# Altium PCB pwr_pcube.PcbDoc
Units mm, origin at the board's own origin, x right, y up, seen from the top; angles counter-clockwise.
Board outline 39.6 x 39.6 mm, 2 copper layers (Top Layer, Bottom Layer); 237 components, 177 nets, 628 pads, 12 vias.
Unrouted connection lines stored in the file: 418.
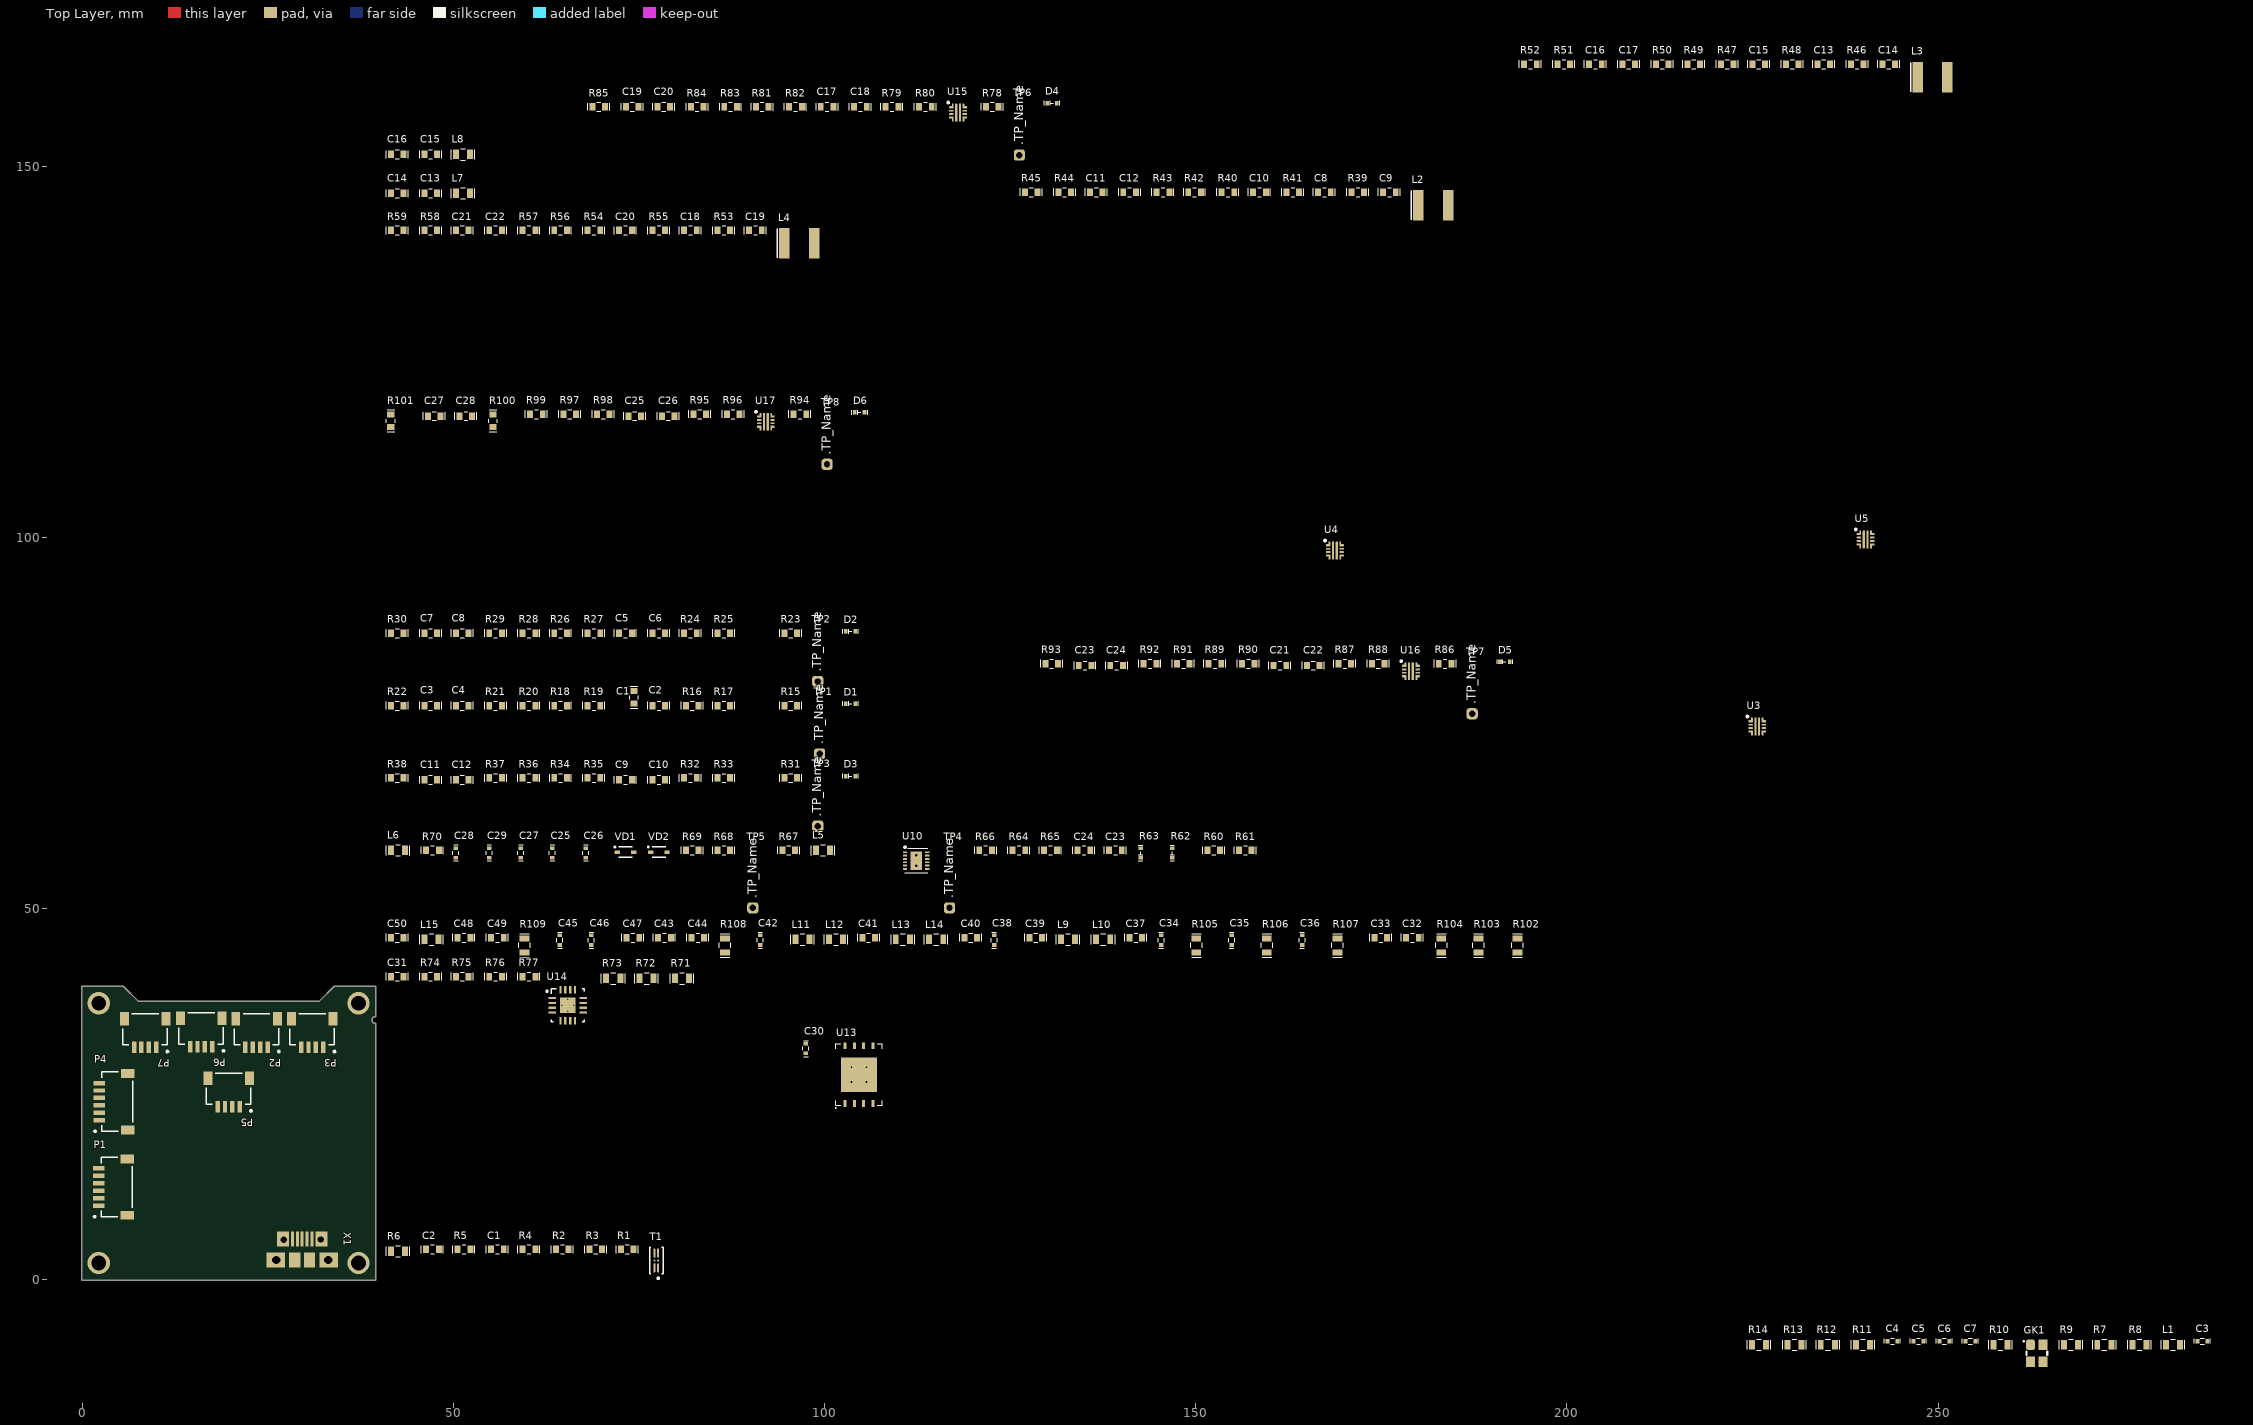
[diagram p0: Top Layer view]
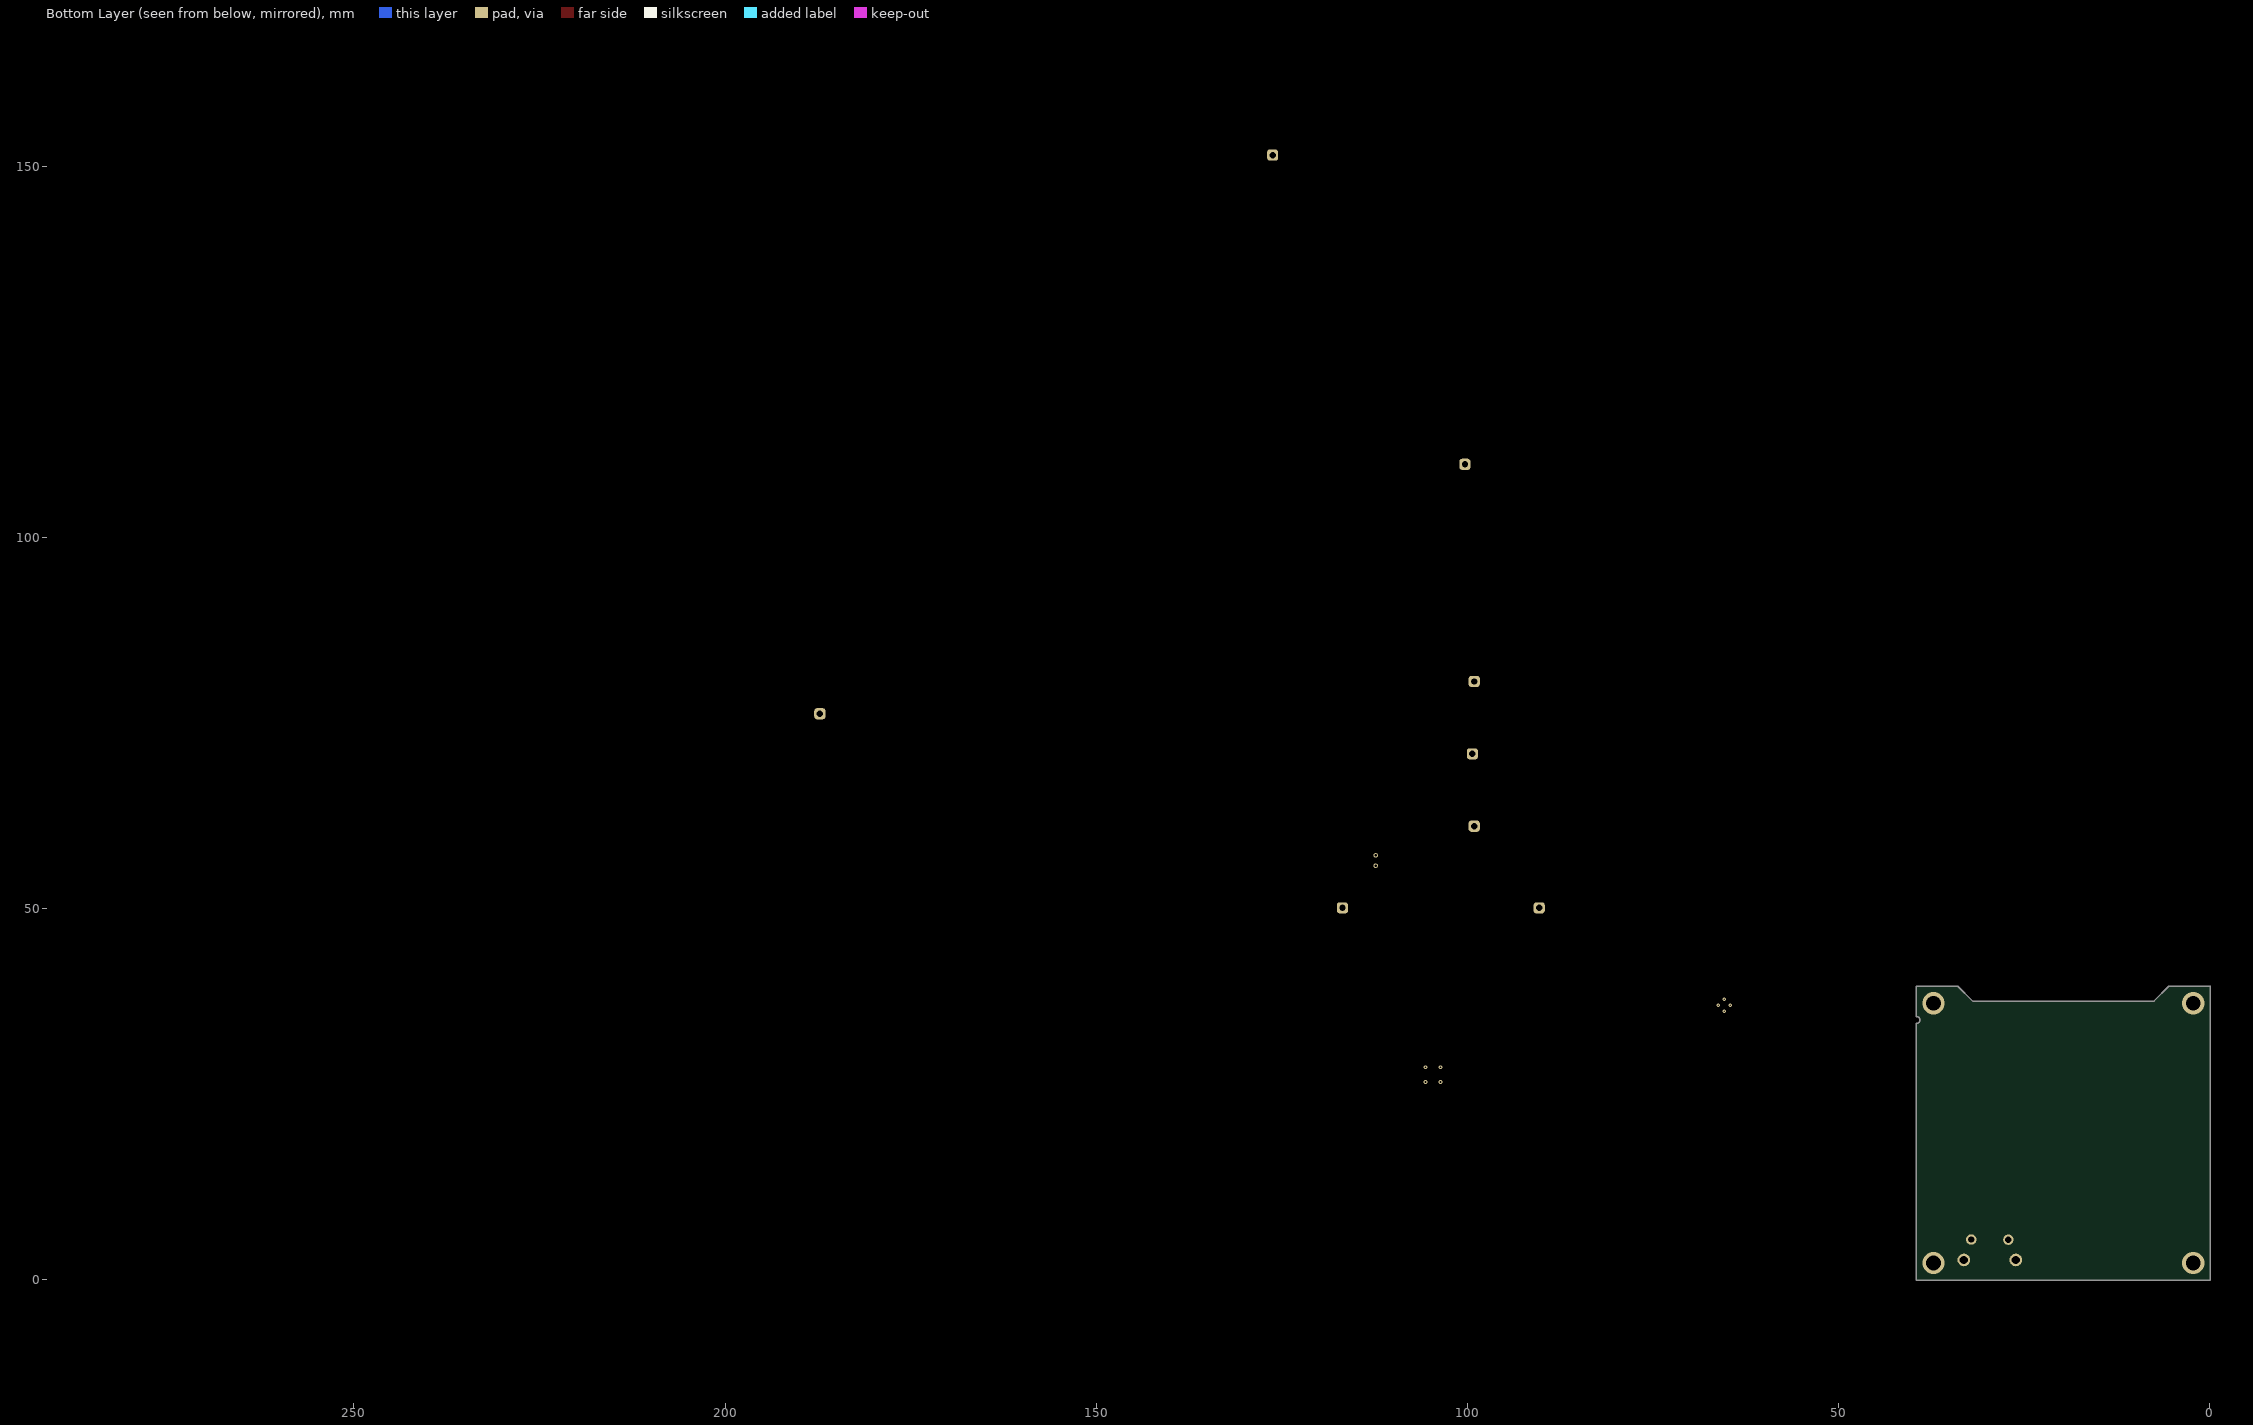
[diagram p1: Bottom Layer view, seen from below]

## Layer stack, top to bottom
Top Solder: solder mask 0.0102, Solder Resist, Dk 3.5
Top Layer: signal copper 0.0356
Dielectric 1: dielectric 0.32, FR-4, Dk 4.8
Bottom Layer: signal copper 0.0356
Bottom Solder: solder mask 0.0102, Solder Resist, Dk 3.5

## Board outline
0,-0.05 cw(c0,0) -0.05,0 -0.05,39.5 cw(c0,39.5) 0,39.55 5.5,39.55 cw(c5.5,39.5) 5.536,39.535 7.521,37.55 31.979,37.55 33.964,39.536 cw(c34,39.5) 34,39.55 39.5,39.55 cw(c39.5,39.5) 39.55,39.5 39.55,35.5 cw(c39.5,35.5) 39.5,35.45 ccw(c39.5,35) 39.5,34.55 cw(c39.5,34.5) 39.55,34.5 39.55,0 cw(c39.5,0) 39.5,-0.05

## Design rules (kind name [scope] priority, off if disabled: settings)
Clearance [All] p1: gap=0.254 ignorepadtopadclearanceinfootprint=FALSE except(0: Arc-Hole Track-Hole SMDPad-Hole THPad-Hole Via-Hole Fill-Hole Poly-Hole Region-Hole Text-Hole)
DiffPairsRouting [All] p1: maxlimit=0.254 minlimit=0.254 mostfreqgap=0.254 toplayer_minwidth=0.381 toplayer_maxwidth=0.381 toplayer_prefwidth=0.381 bottomlayer_minwidth=0.381 bottomlayer_maxwidth=0.381 bottomlayer_prefwidth=0.381 maxuncoupledlength=12.7
PolygonConnect [All] p1: connectstyle=Relief reliefconductorwidth=0.254 reliefentries=4 polygonreliefangle="90 Angle" airgapwidth=0.254
RoomDefinition VBat-5V0 [InComponentClass('VBat-5V0')] p1: confinementstyle=ConfineIn formatcopy=TRUE lockcomponents=FALSE outline 40.6,150.6 53.1,150.6 53.1,154.6 40.6,154.6
RoomDefinition VBat-3V3 [InComponentClass('VBat-3V3')] p2: confinementstyle=ConfineIn formatcopy=TRUE lockcomponents=FALSE outline 40.6,145.35 53.1,145.35 53.1,149.35 40.6,149.35
RoomDefinition SolarPanel_Input_3 [InComponentClass('SolarPanel_Input_3')] p3: confinementstyle=ConfineIn formatcopy=TRUE lockcomponents=FALSE outline 40.6,137.1 99.85,137.1 99.85,144.1 40.6,144.1
RoomDefinition SolarPanel_Input_2 [InComponentClass('SolarPanel_Input_2')] p4: confinementstyle=ConfineIn formatcopy=TRUE lockcomponents=FALSE outline 193.25,95.25 252.5,95.25 252.5,166.5 193.25,166.5
RoomDefinition SolarPanel_Input_1 [InComponentClass('SolarPanel_Input_1')] p5: confinementstyle=ConfineIn formatcopy=TRUE lockcomponents=FALSE outline 126,106 185.25,106 185.25,149.25 126,149.25
RoomDefinition RF [InComponentClass('RF')] p6: confinementstyle=ConfineIn formatcopy=TRUE lockcomponents=FALSE outline 40.6,43.1 196.6,43.1 196.6,49.1 40.6,49.1
RoomDefinition memory [InComponentClass('memory')] p7: confinementstyle=ConfineIn formatcopy=TRUE lockcomponents=FALSE outline 96.75,22.75 108,22.75 108,34.5 96.75,34.5
RoomDefinition MCU+LORA [InComponentClass('MCU+LORA')] p8: confinementstyle=ConfineIn formatcopy=TRUE lockcomponents=FALSE outline 223.95,-12 286.95,-12 286.95,50.75 223.95,50.75
RoomDefinition eFuse_6 [InComponentClass('eFuse_6')] p9: confinementstyle=ConfineIn formatcopy=TRUE lockcomponents=FALSE outline 40.6,108.85 106.1,108.85 106.1,119.35 40.6,119.35
RoomDefinition eFuse_5 [InComponentClass('eFuse_5')] p10: confinementstyle=ConfineIn formatcopy=TRUE lockcomponents=FALSE outline 128.75,75.25 193,75.25 193,85.75 128.75,85.75
RoomDefinition eFuse_4 [InComponentClass('eFuse_4')] p11: confinementstyle=ConfineIn formatcopy=TRUE lockcomponents=FALSE outline 67.75,150.5 132,150.5 132,161 67.75,161
RoomDefinition eFuse_3 [InComponentClass('eFuse_3')] p12: confinementstyle=ConfineIn formatcopy=TRUE lockcomponents=FALSE outline 40.6,79.6 104.85,79.6 104.85,90.1 40.6,90.1
RoomDefinition eFuse_2 [InComponentClass('eFuse_2')] p13: confinementstyle=ConfineIn formatcopy=TRUE lockcomponents=FALSE outline 40.6,69.85 104.85,69.85 104.85,80.35 40.6,80.35
RoomDefinition eFuse_1 [InComponentClass('eFuse_1')] p14: confinementstyle=ConfineIn formatcopy=TRUE lockcomponents=FALSE outline 40.6,60.1 104.85,60.1 104.85,70.35 40.6,70.35
RoutingVias [All] p1: holewidth=0.711 width=1.27 viastyle="Through Hole" minholewidth=0.711 minwidth=1.27 maxholewidth=0.711 maxwidth=1.27
SolderMaskExpansion [All] p1: expansion=0.102 istentingtop=FALSE
Width [All] p1: maxlimit=0.254 minlimit=0.254 preferedwidth=0.254
29 further rules are at their usual default settings.

## Classes and differential pairs
channel class mboard_dcdc: VBat-3V3 VBat-5V0
component class VBat-5V0: L8 U12 С15 С16
component class VBat-3V3: L7 U11 С13 С14
component class RF: C32 C33 C34 C35 C36 C37 C38 C39 C40 C41 C42 C43 C44 C45 C46 C47 C48 C49 C50 J1 L9 L10 L11 L12 L13 L14 L15 R102 R103 R104 R105 R106 R107 R108 R109 U18 U19 U20
component class pwr_ctrl_0: C31 R71 R72 R73 R74 R75 R76 R77 U14
component class memory: C30 U13
component class eFuse_6: D6 R94 R95 R96 R97 R98 R99 R100 R101 TP8 U17 С25 С26 С27 С28
component class eFuse_5: D5 R86 R87 R88 R89 R90 R91 R92 R93 TP7 U16 С21 С22 С23 С24
component class eFuse_4: D4 R78 R79 R80 R81 R82 R83 R84 R85 TP6 U15 С17 С18 С19 С20
component class eFuse_1: D3 R31 R32 R33 R34 R35 R36 R37 R38 TP3 U5 С9 С10 С11 С12
channel class mboard_pwr_harvewster: SolarPanel_Input_1 SolarPanel_Input_2 SolarPanel_Input_3
channel class mboard_pwr_fuse: eFuse_2 eFuse_3 eFuse_11 eFuse_12
component class VCP_FTDI: C23 C24 C25 C26 C27 C28 C29 L5 L6 R60 R61 R62 R63 R64 R65 R66 R67 R68 R69 R70 TP4 TP5 U7 U10 VD1 VD2 X1
component class SolarPanel_Input_3: C18 C19 C20 C21 C22 L4 R53 R54 R55 R56 R57 R58 R59 U6
component class SolarPanel_Input_2: C13 C14 C15 C16 C17 L3 R46 R47 R48 R49 R50 R51 R52
component class SolarPanel_Input_1: C8 C9 C10 C11 C12 L2 R39 R40 R41 R42 R43 R44 R45
component class MCU+LORA: C3 C4 C5 C6 C7 GK1 L1 R7 R8 R9 R10 R11 R12 R13 R14
component class mboard: P1 P2 P3 P4 P5 P6 P7
component class eFuse_3: D2 R23 R24 R25 R26 R27 R28 R29 R30 TP2 U4 С5 С6 С7 С8
component class eFuse_2: D1 R15 R16 R17 R18 R19 R20 R21 R22 TP1 U3 С1 С2 С3 С4
component class Battery_Ctrl: C1 C2 R1 R2 R3 R4 R5 R6 T1 U1
differential pair USB: +USB_P -USB_N
differential pair I_USB: +I_USB_P -I_USB_N

## Components (designator, comment, footprint, x,y, rotation, side; value= is the part's Value field where it differs from the comment)
C1 "0.1мкФ" SMD_C0603 55.1,4.1 r0 top (schematic designator C7)
C2 "0.1мкФ" SMD_C0603 46.35,4.1 r0 top (schematic designator C8)
C3 "K10-79" SMD_C0402 284.95,-8.25 r0 top value=0,47мкФ (schematic designator C16)
C4 "K10-79" SMD_C0402 243.2,-8.25 r0 top value=0,1мкФ (schematic designator C37)
C5 "K10-79" SMD_C0402 246.7,-8.25 r0 top value=0,1мкФ (schematic designator C38)
C6 "K10-79" SMD_C0402 250.2,-8.25 r0 top value=0,1мкФ (schematic designator C39)
C7 "K10-79" SMD_C0402 253.7,-8.25 r0 top value=0,1мкФ (schematic designator C40)
C8 "10мкФ" SMD_C0603 166.5,146.5 r0 top (schematic designator C2)
C9 "10мкФ" SMD_C0603 175.25,146.5 r0 top (schematic designator C3)
C10 "10мкФ" SMD_C0603 157.75,146.5 r0 top (schematic designator C4)
C11 "10нФ" SMD_C0603 135.75,146.5 r0 top (schematic designator C5)
C12 "1мкФ" SMD_C0603 140.25,146.5 r0 top (schematic designator C6)
C13 "10мкФ" SMD_C0603 233.75,163.75 r0 top (schematic designator C2)
C14 "10мкФ" SMD_C0603 242.5,163.75 r0 top (schematic designator C3)
C15 "10мкФ" SMD_C0603 225,163.75 r0 top (schematic designator C4)
C16 "10нФ" SMD_C0603 203,163.75 r0 top (schematic designator C5)
C17 "1мкФ" SMD_C0603 207.5,163.75 r0 top (schematic designator C6)
C18 "10мкФ" SMD_C0603 81.1,141.35 r0 top (schematic designator C2)
C19 "10мкФ" SMD_C0603 89.85,141.35 r0 top (schematic designator C3)
C20 "10мкФ" SMD_C0603 72.35,141.35 r0 top (schematic designator C4)
C21 "10нФ" SMD_C0603 50.35,141.35 r0 top (schematic designator C5)
C22 "1мкФ" SMD_C0603 54.85,141.35 r0 top (schematic designator C6)
C23 "10мкФ" SMD_C0603 138.35,57.85 r0 top (schematic designator C9)
C24 "10мкФ" SMD_C0603 134.1,57.85 r0 top (schematic designator C10)
C25 "47пФ" SMD_C0402 63.35,56.85 r90 top (schematic designator C11)
C26 "47пФ" SMD_C0402 67.85,56.85 r90 top (schematic designator C12)
C27 "0.1мкФ" SMD_C0402 59.1,56.85 r90 top (schematic designator C13)
C28 "10нФ" SMD_C0402 50.35,56.85 r90 top (schematic designator C14)
C29 "0.1мкФ" SMD_C0402 54.85,56.85 r90 top (schematic designator C15)
C30 "K10-79" SMD_C0402 97.5,30.5 r90 top value=0,1мкФ (schematic designator C36)
C31 "0.1мкФ" SMD_C0603 41.6,40.85 r0 top (schematic designator C1)
C32 "K10-79" SMD_C0603 178.35,46.1 r0 top value=68пФ (schematic designator C17)
C33 "K10-79" SMD_C0603 174.1,46.1 r0 top value=10нФ (schematic designator C18)
C34 "K10-79" SMD_C0402 145.35,45.1 r90 top value=1нФ (schematic designator C19)
C35 "K10-79" SMD_C0402 154.85,45.1 r90 top value=1нФ (schematic designator C20)
C36 "K10-79" SMD_C0402 164.35,45.1 r90 top value=1нФ (schematic designator C21)
C37 "K10-79" SMD_C0603 141.1,46.1 r0 top value=47нФ (schematic designator C22)
C38 "K10-79" SMD_C0402 122.85,45.1 r90 top value=100пФ (schematic designator C23)
C39 "K10-79" SMD_C0603 127.6,46.1 r0 top value=100пФ (schematic designator C24)
C40 "K10-79" SMD_C0603 118.85,46.1 r0 top value=68пФ (schematic designator C25)
C41 "K10-79" SMD_C0603 105.1,46.1 r0 top value=68пФ (schematic designator C26)
C42 "K10-79" SMD_C0402 91.35,45.1 r90 top value=4.3пФ (schematic designator C27)
C43 "K10-79" SMD_C0603 77.6,46.1 r0 top value=6.8пФ (schematic designator C28)
C44 "K10-79" SMD_C0603 82.1,46.1 r0 top value=6.9пФ (schematic designator C29)
C45 "K10-79" SMD_C0402 64.35,45.1 r90 top value=DNP (schematic designator C30)
C46 "K10-79" SMD_C0402 68.6,45.1 r90 top value=0,1мкФ (schematic designator C31)
C47 "K10-79" SMD_C0603 73.35,46.1 r0 top value=5.6пФ (schematic designator C32)
C48 "K10-79" SMD_C0603 50.6,46.1 r0 top value=3.6пФ (schematic designator C33)
C49 "K10-79" SMD_C0603 55.1,46.1 r0 top value=DNP (schematic designator C34)
C50 "K10-79" SMD_C0603 41.6,46.1 r0 top value=4.7пФ (schematic designator C35)
D1 "LED" LED_0402_RED 102.85,77.6 r0 top value=red
D2 "LED" LED_0402_RED 102.85,87.35 r0 top value=red (schematic designator D1)
D3 "LED" LED_0402_RED 102.85,67.85 r0 top value=red (schematic designator D1)
D4 "LED" LED_0402_RED 130,158.5 r0 top value=red (schematic designator D1)
D5 "LED" LED_0402_RED 191,83.25 r0 top value=red (schematic designator D1)
D6 "LED" LED_0402_RED 104.1,116.85 r0 top value=red (schematic designator D1)
GK1 "ASFL1-32.000MHZ-EK" SMD_3025_Crustal_Oscilator 262.45,-8.75 r0 top
L1 "1мкГн" SMD_0805 280.7,-8.75 r0 top (schematic designator L4)
L2 "LPS4018-223ML" INDUCTOR-4x4 182,144.75 r0 top value=10мкГн (schematic designator L1)
L3 "LPS4018-223ML" INDUCTOR-4x4 249.25,162 r0 top value=10мкГн (schematic designator L1)
L4 "LPS4018-223ML" INDUCTOR-4x4 96.6,139.6 r0 top value=10мкГн (schematic designator L1)
L5 "1мкГн" SMD_0805 98.85,57.85 r0 top (schematic designator L2)
L6 "1мкГн" SMD_0805 41.6,57.85 r0 top (schematic designator L3)
L7 "Inductor" SMD_0805 50.35,146.35 r0 top value=4.7мкГн (schematic designator L12)
L8 "Inductor" SMD_0805 50.35,151.6 r0 top value=4.7мкГн (schematic designator L12)
L9 "Inductor" SMD_0805 131.85,45.85 r0 top value=68нГн (schematic designator L5)
L10 "Inductor" SMD_0805 136.6,45.85 r0 top value=82нГн (schematic designator L6)
L11 "Inductor" SMD_0805 96.1,45.85 r0 top value=6.8нГн (schematic designator L7)
L12 "Inductor" SMD_0805 100.6,45.85 r0 top value=6.8нГн (schematic designator L8)
L13 "Inductor" SMD_0805 109.6,45.85 r0 top value=6.8нГн (schematic designator L9)
L14 "Inductor" SMD_0805 114.1,45.85 r0 top value=16нГн (schematic designator L10)
L15 "Inductor" SMD_0805 46.1,45.85 r0 top value=332нГн (schematic designator L11)
P1 "SH_1.0_6" SH_1.0_6#1 4.188,12.5 r90 top
P2 "SH_1.0_4" SH_1.0_6#2 23.5,33.25 r180 top
P3 "SH_1.0_4" SH_1.0_6#2 31,33.25 r180 top
P4 "SH_1.0_6" SH_1.0_6#1 4.25,24 r90 top
P5 "SH_1.0_4" SH_1.0_6#2 19.75,25.25 r180 top
P6 "SH_1.0_4" SH_1.0_6#2 16.05,33.35 r180 top
P7 "SH_1.0_4" SH_1.0_6#2 8.5,33.25 r180 top
R1 "1к" SMD_0603 72.6,4.1 r0 top (schematic designator R23)
R2 "300" SMD_0603 63.85,4.1 r0 top (schematic designator R24)
R3 "20" SMD_0603 68.35,4.1 r0 top (schematic designator R25)
R4 "100" SMD_0603 59.35,4.1 r0 top (schematic designator R26)
R5 "100" SMD_0603 50.6,4.1 r0 top (schematic designator R27)
R6 "10мОм 1% 100ppm/°C" SMD_0805 41.6,3.85 r0 top (schematic designator R28)
R7 "OSM R1-12" SMD_0805 271.45,-8.75 r0 top value=10к (schematic designator R40)
R8 "OSM R1-12" SMD_0805 276.2,-8.75 r0 top value=10к (schematic designator R41)
R9 "OSM R1-12" SMD_0805 266.95,-8.75 r0 top value=10к (schematic designator R54)
R10 "OSM R1-12" SMD_0805 257.45,-8.75 r0 top value=10к (schematic designator R55)
R11 "OSM R1-12" SMD_0805 238.95,-8.75 r0 top value=100к (schematic designator R42)
R12 "OSM R1-12" SMD_0805 234.2,-8.75 r0 top value=10к (schematic designator R43)
R13 "OSM R1-12" SMD_0805 229.7,-8.75 r0 top value=0 (schematic designator R44)
R14 "OSM R1-12" SMD_0805 224.95,-8.75 r0 top value=DNP (schematic designator R45)
R15 "10к" SMD_0603 94.6,77.35 r0 top (schematic designator R1)
R16 "470к" SMD_0603 81.35,77.35 r0 top (schematic designator R2)
R17 "47к" SMD_0603 85.6,77.35 r0 top (schematic designator R3)
R18 "91к" SMD_0603 63.6,77.35 r0 top (schematic designator R4)
R19 "18к" SMD_0603 68.1,77.35 r0 top (schematic designator R5)
R20 "10к" SMD_0603 59.35,77.35 r0 top (schematic designator R6)
R21 "1к" SMD_0603 54.85,77.35 r0 top (schematic designator R7)
R22 "3.3к" SMD_0603 41.6,77.35 r0 top (schematic designator R8)
R23 "10к" SMD_0603 94.6,87.1 r0 top (schematic designator R1)
R24 "470к" SMD_0603 81.1,87.1 r0 top (schematic designator R2)
R25 "47к" SMD_0603 85.6,87.1 r0 top (schematic designator R3)
R26 "91к" SMD_0603 63.6,87.1 r0 top (schematic designator R4)
R27 "18к" SMD_0603 68.1,87.1 r0 top (schematic designator R5)
R28 "10к" SMD_0603 59.35,87.1 r0 top (schematic designator R6)
R29 "1к" SMD_0603 54.85,87.1 r0 top (schematic designator R7)
R30 "3.3к" SMD_0603 41.6,87.1 r0 top (schematic designator R8)
R31 "10к" SMD_0603 94.6,67.6 r0 top (schematic designator R1)
R32 "470к" SMD_0603 81.1,67.6 r0 top (schematic designator R2)
R33 "47к" SMD_0603 85.6,67.6 r0 top (schematic designator R3)
R34 "91к" SMD_0603 63.6,67.6 r0 top (schematic designator R4)
R35 "18к" SMD_0603 68.1,67.6 r0 top (schematic designator R5)
R36 "10к" SMD_0603 59.35,67.6 r0 top (schematic designator R6)
R37 "1к" SMD_0603 54.85,67.6 r0 top (schematic designator R7)
R38 "3.3к" SMD_0603 41.6,67.6 r0 top (schematic designator R8)
R39 "2M2" SMD_0603 171,146.5 r0 top (schematic designator R16)
R40 "2M2" SMD_0603 153.5,146.5 r0 top (schematic designator R17)
R41 "1M" SMD_0603 162.25,146.5 r0 top (schematic designator R18)
R42 "10к" SMD_0603 149,146.5 r0 top (schematic designator R19)
R43 "1M" SMD_0603 144.75,146.5 r0 top (schematic designator R20)
R44 "0" SMD_0603 131.5,146.5 r0 top (schematic designator R21)
R45 "1M" SMD_0603 127,146.5 r0 top (schematic designator R22)
R46 "2M2" SMD_0603 238.25,163.75 r0 top (schematic designator R16)
R47 "2M2" SMD_0603 220.75,163.75 r0 top (schematic designator R17)
R48 "1M" SMD_0603 229.5,163.75 r0 top (schematic designator R18)
R49 "10к" SMD_0603 216.25,163.75 r0 top (schematic designator R19)
R50 "1M" SMD_0603 212,163.75 r0 top (schematic designator R20)
R51 "0" SMD_0603 198.75,163.75 r0 top (schematic designator R21)
R52 "1M" SMD_0603 194.25,163.75 r0 top (schematic designator R22)
R53 "2M2" SMD_0603 85.6,141.35 r0 top (schematic designator R16)
R54 "2M2" SMD_0603 68.1,141.35 r0 top (schematic designator R17)
R55 "1M" SMD_0603 76.85,141.35 r0 top (schematic designator R18)
R56 "10к" SMD_0603 63.6,141.35 r0 top (schematic designator R19)
R57 "1M" SMD_0603 59.35,141.35 r0 top (schematic designator R20)
R58 "0" SMD_0603 46.1,141.35 r0 top (schematic designator R21)
R59 "1M" SMD_0603 41.6,141.35 r0 top (schematic designator R22)
R60 "10к" SMD_0603 151.6,57.85 r0 top (schematic designator R29)
R61 "10к" SMD_0603 155.85,57.85 r0 top (schematic designator R30)
R62 "LED" LED_0402_RED 146.85,56.85 r90 top value=red (schematic designator R31)
R63 "LED" LED_0402_RED 142.6,56.85 r90 top value=green (schematic designator R32)
R64 "10к" SMD_0603 125.35,57.85 r0 top (schematic designator R33)
R65 "100к" SMD_0603 129.6,57.85 r0 top (schematic designator R34)
R66 "10к" SMD_0603 120.85,57.85 r0 top (schematic designator R35)
R67 "33" SMD_0603 94.35,57.85 r0 top (schematic designator R36)
R68 "33" SMD_0603 85.6,57.85 r0 top (schematic designator R37)
R69 "4.7к" SMD_0603 81.35,57.85 r0 top (schematic designator R38)
R70 "10к" SMD_0603 46.35,57.85 r0 top (schematic designator R39)
R71 "10мОм 1% 100ppm/°C" SMD_0805 79.85,40.6 r0 top (schematic designator R9)
R72 "10мОм 1% 100ppm/°C" SMD_0805 75.1,40.6 r0 top (schematic designator R10)
R73 "10мОм 1% 100ppm/°C" SMD_0805 70.6,40.6 r0 top (schematic designator R11)
R74 "10к" SMD_0603 46.1,40.85 r0 top (schematic designator R12)
R75 "10к" SMD_0603 50.35,40.85 r0 top (schematic designator R13)
R76 "10к" SMD_0603 54.85,40.85 r0 top (schematic designator R14)
R77 "10к" SMD_0603 59.35,40.85 r0 top (schematic designator R15)
R78 "10к" SMD_0603 121.75,158 r0 top (schematic designator R1)
R79 "470к" SMD_0603 108.25,158 r0 top (schematic designator R2)
R80 "47к" SMD_0603 112.75,158 r0 top (schematic designator R3)
R81 "91к" SMD_0603 90.75,158 r0 top (schematic designator R4)
R82 "18к" SMD_0603 95.25,158 r0 top (schematic designator R5)
R83 "10к" SMD_0603 86.5,158 r0 top (schematic designator R6)
R84 "1к" SMD_0603 82,158 r0 top (schematic designator R7)
R85 "3.3к" SMD_0603 68.75,158 r0 top (schematic designator R8)
R86 "10к" SMD_0603 182.75,83 r0 top (schematic designator R1)
R87 "470к" SMD_0603 169.25,83 r0 top (schematic designator R2)
R88 "47к" SMD_0603 173.75,83 r0 top (schematic designator R3)
R89 "91к" SMD_0603 151.75,83 r0 top (schematic designator R4)
R90 "18к" SMD_0603 156.25,83 r0 top (schematic designator R5)
R91 "10к" SMD_0603 147.5,83 r0 top (schematic designator R6)
R92 "1к" SMD_0603 143,83 r0 top (schematic designator R7)
R93 "3.3к" SMD_0603 129.75,83 r0 top (schematic designator R8)
R94 "10к" SMD_0603 95.85,116.6 r0 top (schematic designator R1)
R95 "470к" SMD_0603 82.35,116.6 r0 top (schematic designator R2)
R96 "47к" SMD_0603 86.85,116.6 r0 top (schematic designator R3)
R97 "91к" SMD_0603 64.85,116.6 r0 top (schematic designator R4)
R98 "18к" SMD_0603 69.35,116.6 r0 top (schematic designator R5)
R99 "10к" SMD_0603 60.35,116.6 r0 top (schematic designator R6)
R100 "1к" SMD_0603 55.35,114.85 r90 top (schematic designator R7)
R101 "3.3к" SMD_0603 41.6,114.85 r90 top (schematic designator R8)
R102 "OSM R1-12" SMD_0805 193.35,44.1 r90 top value=100 (schematic designator R46)
R103 "OSM R1-12" SMD_0805 188.1,44.1 r90 top value=100 (schematic designator R47)
R104 "OSM R1-12" SMD_0805 183.1,44.1 r90 top value=100 (schematic designator R48)
R105 "OSM R1-12" SMD_0805 150.1,44.1 r90 top value=1M (schematic designator R49)
R106 "OSM R1-12" SMD_0805 159.6,44.1 r90 top value=1M (schematic designator R50)
R107 "OSM R1-12" SMD_0805 169.1,44.1 r90 top value=1M (schematic designator R51)
R108 "OSM R1-12" SMD_0805 86.6,44.1 r90 top value=50 (schematic designator R52)
R109 "OSM R1-12" SMD_0805 59.6,44.1 r90 top value=10k (schematic designator R53)
T1 "EFC8811R-TF" FP-568AL-MFG 77.35,2.6 r90 top
TP1 "V_OUT" TestPoint 99.35,70.85 r90 top
TP2 "V_OUT" TestPoint 99.1,80.6 r90 top (schematic designator TP1)
TP3 "V_OUT" TestPoint 99.1,61.1 r90 top (schematic designator TP1)
TP4 "VCP_RX" TestPoint 116.85,50.1 r90 top (schematic designator TP2)
TP5 "VCP_TX" TestPoint 90.35,50.1 r90 top (schematic designator TP3)
TP6 "V_OUT" TestPoint 126.25,151.5 r90 top (schematic designator TP1)
TP7 "V_OUT" TestPoint 187.25,76.25 r90 top (schematic designator TP1)
TP8 "V_OUT" TestPoint 100.35,109.85 r90 top (schematic designator TP1)
U3 "TPS25947x" VQFN-HR-10 225.65,74.55 r0 top (schematic designator U1)
U4 "TPS25947x" VQFN-HR-10 168.75,98.25 r0 top (schematic designator U1)
U5 "TPS25947x" VQFN-HR-10 240.25,99.75 r0 top (schematic designator U1)
U10 "FT234XD" DFN-12 110.85,57.6 r0 top (schematic designator U6)
U13 "S25FL128SAGN" WSON-8_6x8 102.75,23.75 r90 top (schematic designator U12)
U14 "INA3221" VQFN-16 65.421,36.975 r0 top (schematic designator U2)
U15 "TPS25947x" VQFN-HR-10 118,157.25 r0 top (schematic designator U1)
U16 "TPS25947x" VQFN-HR-10 179,82 r0 top (schematic designator U1)
U17 "TPS25947x" VQFN-HR-10 92.1,115.6 r0 top (schematic designator U1)
VD1 "PESD5V0" SOD-323 72.1,57.6 r0 top
VD2 "PESD5V0" SOD-323 76.6,57.6 r0 top
X1 "mico-BF" MicroUSB-Molex-105017 29.65,5.375 r0 top
С1 "10uF 25V" SMD_C0603 74.35,77.6 r90 top
С2 "10uF 25V" SMD_C0603 76.85,77.35 r0 top
С3 "2.4нФ" SMD_C0603 46.1,77.35 r0 top
С4 "16нФ" SMD_C0603 50.35,77.35 r0 top
С5 "10uF 25V" SMD_C0603 72.35,87.1 r0 top (schematic designator С1)
С6 "10uF 25V" SMD_C0603 76.85,87.1 r0 top (schematic designator С2)
С7 "2.4нФ" SMD_C0603 46.1,87.1 r0 top (schematic designator С3)
С8 "16нФ" SMD_C0603 50.35,87.1 r0 top (schematic designator С4)
С9 "10uF 25V" SMD_C0603 72.35,67.35 r0 top (schematic designator С1)
С10 "10uF 25V" SMD_C0603 76.85,67.35 r0 top (schematic designator С2)
С11 "2.4нФ" SMD_C0603 46.1,67.35 r0 top (schematic designator С3)
С12 "16нФ" SMD_C0603 50.35,67.35 r0 top (schematic designator С4)
С13 "10uF 25V" SMD_C0603 46.1,146.35 r0 top (schematic designator С5)
С14 "10uF 25V" SMD_C0603 41.6,146.35 r0 top (schematic designator С6)
С15 "10uF 25V" SMD_C0603 46.1,151.6 r0 top (schematic designator С5)
С16 "10uF 25V" SMD_C0603 41.6,151.6 r0 top (schematic designator С6)
С17 "10uF 25V" SMD_C0603 99.5,158 r0 top (schematic designator С1)
С18 "10uF 25V" SMD_C0603 104,158 r0 top (schematic designator С2)
С19 "2.4нФ" SMD_C0603 73.25,158 r0 top (schematic designator С3)
С20 "16нФ" SMD_C0603 77.5,158 r0 top (schematic designator С4)
С21 "10uF 25V" SMD_C0603 160.5,82.75 r0 top (schematic designator С1)
С22 "10uF 25V" SMD_C0603 165,82.75 r0 top (schematic designator С2)
С23 "2.4нФ" SMD_C0603 134.25,82.75 r0 top (schematic designator С3)
С24 "16нФ" SMD_C0603 138.5,82.75 r0 top (schematic designator С4)
С25 "10uF 25V" SMD_C0603 73.6,116.35 r0 top (schematic designator С1)
С26 "10uF 25V" SMD_C0603 78.1,116.35 r0 top (schematic designator С2)
С27 "2.4нФ" SMD_C0603 46.6,116.35 r0 top (schematic designator С3)
С28 "16нФ" SMD_C0603 50.85,116.35 r0 top (schematic designator С4)

## Footprints (in the part's own frame and the unit in brackets; to place one, negate y for a bottom-side part, rotate by r counter-clockwise, add the part's x,y. Pads: shape width x height; smd on the part's side, far side on the other; paste and mask are expansions set on the pad)
DFN-12 [mm] "DFN, 12-Leads, Body 3,00x3,00mm, Pitch 0,45mm, Thermal Pad 1,58x2,48mm, IPC Medium Density"
  rect 0.6x0.25 smd: 1(0,0) 2(0,-0.45) 3(0,-0.9) 4(0,-1.35) 5(0,-1.8) 6(0,-2.25) 7(3,-2.25) 8(3,-1.8) 9(3,-1.35) 10(3,-0.9) 11(3,-0.45) 12(3,0)
  rect 1.58x2.48 smd: 13(1.5,-1.125)
  round 0.6 hole 0.3: 13(1.525,-1.825) 13(1.525,-0.425)
  silkscreen extent -0.12,-2.75 3.05,0.8, body extent -0.05,-2.62 3.05,0.38, height 0.75
FP-568AL-MFG [mm]
  rrect100% 1.25x0.25 smd paste+0 mask+0: 1(-1,-0.25) 3(1,-0.25) 4(1,0.25) 6(-1,0.25)
  round 0.25 smd paste+0 mask+0: 2(0,-0.25) 5(0,0.25)
  silkscreen extent -2.52,-0.91 1.8,0.91, body extent -1.9,-1.01 1.9,1.01, height 0.25
INDUCTOR-4x4 [mm] "Precision Wire Wound Inductor, 2-Leads, Body 4,00x4,00mm, IPC Medium Density"
  rect 1.4x4.1 smd: 1(-2,0) 2(2,0)
  silkscreen extent -2.95,-1.95 -2.95,1.95, body extent -2.1,-2 2.1,2, height 1.8
LED_0402_RED [mm]
  rect 0.5x0.6 smd: 1(0,0) 2(1.3,0)
  silkscreen extent -0.4,-0.3 1.7,0.3, body extent 0.2,-0.3 1.2,0.3, height 0.2
MicroUSB-Molex-105017 [mm]
  rect 2.5x2 smd: 0(-3.575,-2.725) 0(3.575,-2.725)
  round 1.7 hole 1.1 mask+0.15: 0(-3.5,-2.7) 0(3.5,-2.7)
  rect 1.6x2 smd: 0(-2.6,0.125) 0(2.6,0.125)
  round 1.4 hole 0.85: 0(-2.5,0.025) 0(2.5,0.05)
  rect 1.5x2 smd: 0(-1,-2.725) 0(1,-2.725)
  rect 0.4x2 smd: 1(-1.3,0.125) 2(-0.65,0.125) 3(0,0.125) 4(0.65,0.125) 5(1.3,0.125)
  body extent -4.1,-5.2 4.1,0.2, height 2.78
SH_1.0_6#1 [mm]
  rect 0.6x1.55 smd: 1(-2.5,1.938) 2(-1.5,1.938) 3(-0.5,1.938) 4(0.5,1.938) 5(1.5,1.938) 6(2.5,1.938)
  rect 1.2x1.8 smd: MP1(-3.8,-1.9) MP2(3.8,-1.9)
  silkscreen extent -4.12,-2.6 4,2.62
SH_1.0_6#2 [mm]
  rect 0.6x1.55 smd: 1(-1.5,1.938) 2(-0.5,1.938) 3(0.5,1.938) 4(1.5,1.938)
  rect 1.2x1.8 smd: MP1(-2.8,-1.9) MP2(2.8,-1.9)
  silkscreen extent -3.13,-2.6 3,2.62
SMD_0603 [mm]
  rect 0.8x1 smd: 1(0,0) 2(1.7,0)
  silkscreen extent -0.64,-0.6 2.32,0.6, body extent 0.04,-0.42 1.68,0.43, height 0.43
SMD_0805 [mm]
  rect 0.8x1.3 smd: 1(0,0) 2(1.9,0)
  silkscreen extent -0.64,-0.76 2.54,0.76, body extent -0.05,-0.62 1.95,0.63, height 0.43
SMD_3025_Crustal_Oscilator [mm]
  rrect50% 1.2x1.4 smd: 1(0,0)
  rect 1.2x1.4 smd: 2(0,-2.3) 3(1.7,-2.3) 4(1.7,0)
  silkscreen extent -0.97,-1.38 2.27,0.57, body extent -0.4,-2.75 2.1,0.45, height 1.2
SMD_C0402 [mm]
  rect 0.5x0.6 smd: 1(0,0) 2(1.3,0)
  silkscreen extent -0.43,-0.4 1.73,0.4, body extent 0.05,-0.35 1.25,0.35, height 0.7
SMD_C0603 [mm]
  rect 0.8x1 smd: 1(0,0) 2(1.7,0)
  silkscreen extent -0.64,-0.6 2.32,0.6, body extent 0,-0.45 1.7,0.45, height 0.9
SOD-323 [mm] "SC-76 plastic surface mounted package; 2 leads"
  rrect50% 0.7x0.5 smd: 1(0,0)
  rect 0.7x0.5 smd: 2(2.2,0)
  silkscreen extent -0.38,-0.7 2,0.76, body extent -0.2,-0.67 2.4,0.68, height 1.1
TestPoint [mm]
  rrect50% 1.5x1.5 hole 0.85: 0(0,0)
VQFN-16 [mm]
  rrect33% 1x0.3 smd: 1(-2.079,0.975) 2(-2.079,0.325) 3(-2.079,-0.325) 4(-2.079,-0.975) 9(2.079,-0.975) 10(2.079,-0.325) 11(2.079,0.325) 12(2.079,0.975)
  rrect33% 0.3x1 smd: 5(-0.975,-2.079) 6(-0.325,-2.079) 7(0.325,-2.079) 8(0.975,-2.079) 13(0.975,2.079) 14(0.325,2.079) 15(-0.325,2.079) 16(-0.975,2.079)
  rrect11% 0.939x0.939 on Top Paste: 17(-0.57,-0.57) 17(-0.57,0.57) 17(0.57,-0.57) 17(0.57,0.57)
  rrect5% 2.1x2.1 smd paste-1.08: 17(0,0)
  silkscreen extent -2.92,-2.22 2.22,2.22, body extent -2,-2 2,2, height 0.92
VQFN-HR-10 [mm]
  rrect50% 0.6x0.3 smd: 1(-0.9,0.7) 4(-0.9,-0.7) 7(0.9,-0.7) 10(0.9,0.7)
  rrect50% 0.25x0.6 smd: 1(-0.725,0.875) 4(-0.725,-0.925) 7(0.725,-0.925) 10(0.725,0.875)
  rrect50% 0.6x0.25 smd: 2(-0.9,0.225) 3(-0.9,-0.225) 8(0.9,-0.225) 9(0.9,0.225)
  rrect50% 0.3x2.4 smd: 5(-0.25,-0.025) 6(0.25,-0.025)
  silkscreen extent -1.45,1.2 -1.2,1.45, body extent -1.1,-1.1 1.1,1.1, height 1
WSON-8_6x8 [mm] "SON, 8-Leads, Body 6,00x8,00mm, Pitch 1,27mm, Thermal Pad 4,80x4,65mm, IPC Medium Density"
  rect 0.9x0.4 smd: 1(0,0) 2(0,-1.27) 3(0,-2.54) 4(0,-3.81) 5(7.78,-3.81) 6(7.78,-2.54) 7(7.78,-1.27) 8(7.78,0)
  rect 4.65x4.8 smd paste-2.325: 9(3.89,-1.905)
  silkscreen extent -0.66,-5.03 8.02,1.27, body extent -0.16,-4.91 7.94,1.09, height 0.8

## Part data
C1 C2 C3 C4 C5 C6 C7 C8 C9 C10 C11 C12 C13 C14 C15 C16 C17 C18 C19 C20 C21 C22 C23 C24 C25 C26 C27 C28 C29 C30 C31 C32 C33 C34 C35 C36 C37 C38 C39 C40 C41 C42 C43 C44 C45 C46 C47 C48 C49 C50 С3 С4 С7 С8 С11 С12 С19 С20 С23 С24 С27 С28: library part Capacitor, "Capacitor", Назначение=SMD-конденсатор, Потребление, Вт=0
  C1 C2 C8 C9 C10 C11 C12 C13 C14 C15 C16 C17 C18 C19 C20 C21 C22 C23 C24 C25 C26 C27 C28 C29 C31: Наименование=Конденсатор
  C3 C4 C5 C6 C7 C30 C32 C33 C34 C35 C36 C37 C38 C39 C40 C41 C42 C43 C44 C45 C46 C47 C48 C49 C50: Наименование=К10-79, Напряжение=В, Точность=%
  С3 С4 С7 С8 С11 С12 С19 С20 С23 С24 С27 С28: Наименование=Конденсатор, Напряжение=В, Точность=%
GK1: library part Crystal_Oscillator_2, "Crystall oscillator, CMOS, 3.3V, SMD3025", ComponentLink1Description=DataSheet, ComponentLink1URL=https://abracon.com/Oscillators/ASFL1.pdf, Назначение="XO SMD 3.3V 32.000MHZ 3.2X5MM", Наименование=ASFL1-32.000MHZ-EK, Потребление, Вт=0,165
L1 L2 L3 L4 L5 L6: library part Inductor, "Inductor", Назначение=SMD-индуктивность, Потребление, Вт=0,010
  L1 L5 L6: Наименование=Индуктивность
  L2 L3 L4: Наименование=LPS4018-103ML
P1 P2 P3 P4 P5 P6 P7: "JST SH1.0, 1.0 mm pitch/Disconnactable crimp style connectors", ComponentLink1Description=DataSheet, ComponentLink1URL=https://www.jst-mfg.com/product/pdf/eng/eSH.pdf, Назначение="JST SH1.0, 1.0 mm pitch/Disconnactable crimp style connectors", Потребление, Вт=0.0
  P1 P4: Наименование=SH_1.0_6
  P2 P3 P5 P6 P7: Наименование=SH_1.0_4
R1 R2 R3 R4 R5 R7 R8 R9 R10 R11 R12 R13 R14 R15 R16 R17 R18 R19 R20 R21 R22 R23 R24 R25 R26 R27 R28 R29 R30 R31 R32 R33 R34 R35 R36 R37 R38 R39 R40 R41 R42 R43 R44 R45 R46 R47 R48 R49 R50 R51 R52 R53 R54 R55 R56 R57 R58 R59 R74 R75 R76 R77 R78 R79 R80 R81 R82 R83 R84 R85 R86 R87 R88 R89 R90 R91 R92 R93 R94 R95 R96 R97 R98 R99 R100 R101 R102 R103 R104 R105 R106 R107 R108 R109: library part Resistor, "Resistor", Назначение=SMD-резистор, Потребление, Вт=0,001
  R1 R2 R3 R4 R5 R15 R16 R17 R18 R19 R20 R21 R22 R23 R24 R25 R26 R27 R28 R29 R30 R31 R32 R33 R34 R35 R36 R37 R38 R39 R40 R41 R42 R43 R44 R45 R46 R47 R48 R49 R50 R51 R52 R53 R54 R55 R56 R57 R58 R59 R74 R75 R76 R77 R78 R79 R80 R81 R82 R83 R84 R85 R86 R87 R88 R89 R90 R91 R92 R93 R94 R95 R96 R97 R98 R99 R100 R101: Наименование=Резистор
  R7 R8 R9 R10 R11 R12 R13 R14 R102 R103 R104 R105 R106 R107 R108 R109: Наименование="ОСМ Р1-12", Точность=%
R6 R60 R61 R64 R65 R66 R67 R68 R69 R70 R71 R72 R73: library part Resistor, "PE1206DRM470R01L", Назначение=SMD-резистор, Наименование=Резистор, Потребление, Вт=0,001
T1: "Dual N-Channel power MOSFET", ComponentLink1Description=DataSheet, ComponentLink1URL=https://www.farnell.com/datasheets/2197419.pdf, Назначение="Dual N-Channel power MOSFET", Наименование=EFC8811R-TF, Потребление, Вт=0.001
TP1 TP2 TP3 TP4 TP5 TP6 TP7 TP8: library part TP, Назначение="Контроль параметров платы", Наименование="Точка проверки"
  TP1 TP2 TP3 TP6 TP7 TP8: TP_Name=V_OUT
  TP4: TP_Name=VCP_RX
  TP5: TP_Name=VCP_TX
U3 U4 U5 U15 U16 U17: "TPS25947xx, 2.7 - 23 V, 5.5 A, 28-mΩ True Reverse Current Blocking eFuse with Input / Reverse Polarity Protection", ComponentLink1Description=DataSheet, ComponentLink1URL=https://www.ti.com/lit/ds/symlink/tps25947.pdf?ts=1621925066842&ref_url=https%253A%252F%252Fwww.ti.com%252Fproduct%252FTPS25947%253FkeyMatch%253DTPS25947%2526tisearch%253Dsearch-everything%2526usecase%253DGPN, Назначение="2.7 - 23 V, 5.5 A, 28-mΩ True Reverse Current Blocking eFuse with Input", Наименование=TPS259474LRPW, Потребление, Вт=0,05
U10: "USB TO BASIC UART IC", Supplier Part Number 1=53X3171, ComponentLink1Description=DataSheet, ComponentLink1URL=https://ftdichip.com/wp-content/uploads/2020/08/DS_FT234XD.pdf, Supplier 1=Newark, Назначение="USB TO BASIC UART IC", Наименование=FT234XD, Потребление, Вт=0.03
U13: "Programmable NOR flash memory", Supplier Part Number 1=428-4618-ND, ComponentLink1Description=DataSheet, ComponentLink1URL=https://www.infinite-electronic.ru/datasheet/8b-S25FL256SAGBHV203.pdf, Supplier 1=Digi-Key, Назначение="Programmable NOR flash memory", Наименование=S25FL128SAGN, Потребление, Вт=0.1
U14: "Triple-Channel, High-Side Measurement, / Shunt and Bus Voltage Monitor with I2C- and SMBUS-Compatible Interface", Supplier Part Number 1=INA3221AIRGVT, ComponentLink1Description="Data sheet", ComponentLink1URL=https://www.ti.com/lit/ds/symlink/ina3221.pdf?ts=1635579800802&ref_url=https%253A%252F%252Fwww.ti.com%252Fproduct%252FINA3221, Назначение="Triple-Channel, High-Side Measurement,", Наименование=INA3221, Потребление, Вт=0.001
VD1 VD2: library part PESDxL1BA, "Low capacitance bidirectional ESD protection diodes", ComponentLink1Description=DataSheet, ComponentLink1URL=https://static.chipdip.ru/lib/635/DOC005635911.pdf, Назначение="ESD защитные диоды", Наименование=PESDxL1BA, Потребление, Вт=0.0
X1: library part MicroUSB, "MicroUSB bottom mount receptacle, B-type", Назначение="MicroUSB bottom mount receptacle, B-type", Наименование=SD-105017-001, Потребление, Вт=0
С1 С2 С5 С6 С9 С10 С13 С14 С15 С16 С17 С18 С21 С22 С25 С26: library part Capacitor, "SMD 0603", Назначение="SMD 0603", Наименование=Конденсатор, Напряжение=25В, Потребление, Вт=0, Точность=20%
D1 D2 D3 D4 D5 D6 R62 R63: Назначение="LED 0402 red", Наименование=SMD-LED, Потребление, Вт=0,01
L7 L8 L9 L10 L11 L12 L13 L14 L15: Назначение=SMD-индуктивность, Наименование=Индуктивность, Потребление, Вт=0,010

## Via types
v1: diameter 0.5, hole 0.2, Top Layer to Bottom Layer, 4 vias
v2: diameter 0.5, hole 0.25, Top Layer to Bottom Layer, 4 vias
v3: diameter 3, hole 2, Top Layer to Bottom Layer, 4 vias

## Nets (pads, with @x,y where several pads share a name; then routed paths per layer and width w, separated by ;. In a path a pad name is that pad's centre, name@x,y a point inside that pad or via, vN(x,y) a via of type N, cw(c..) or ccw(c..) an arc to the next point about the centre after c; other vN are vias at no path point)
3V3: C4.1 C5.1 C6.1 C7.1 C27.2 C30.1 C31.2 GK1.4 P7.1 R7.2 R8.2 R11.1 R74.1 R75.1 R76.1 R77.1 U10.9 U13.3 U13.7 U13.8 U14.4 U14.16
3V3_LDO_SolarPanel_Input_1: C10.2 R40.2 R45.2
3V3_LDO_SolarPanel_Input_2: C15.2 R47.2 R52.2
3V3_LDO_SolarPanel_Input_3: C20.2 R54.2 R59.2
5V_RF: C33.1 L10.2 С15.2
FTDI_3V3: R60.1 R61.1 U10.3
GND: C2.2 C3.2 C4.2 C5.2 C6.2 C7.2 C8.2 C9.1 C10.1 C11.2 C12.2 C13.2 C14.1 C15.1 C16.2 C17.2 C18.2 C19.1 C20.1 C21.2 C22.2 C23.1 C24.1 C25.1 C26.1 C27.1 C28.1 C29.1 C30.2 C31.1 C32.2 C33.2 C34.1 C35.1 C36.1 C37.1 C43.1 C44.1 C45.2 C46.2 C47.2 C49.1 C50.2 D1.2 D2.2 D3.2 D4.2 D5.2 D6.2 GK1.2 L6.2 P1.5 P1.6 P1.MP1 P1.MP2 P2.3 P2.4 P2.MP1 P2.MP2 P3.3 P3.4 P3.MP1 P3.MP2 P4.5 P4.6 P4.MP1 P4.MP2 P5.3 P5.4 P5.MP1 P5.MP2 P6.MP1 P6.MP2 P7.4 P7.MP1 P7.MP2 R5.2 R6.2 R9.1 R10.2 R12.1 R19.1 R20.1 R22.1 R27.1 R28.1 R30.1 R35.1 R36.1 R38.1 R41.1 R43.1 R44.1 R48.1 R50.1 R51.1 R55.1 R57.1 R58.1 R64.2 R65.2 R66.2 R70.1 R82.1 R83.1 R85.1 R90.1 R91.1 R93.1 R98.1 R99.1 R101.1 R105.2 R106.2 R107.2 R108.2 R109.1 R109.2 U3.8 U4.8 U5.8 U10.5 U10.13 U13.4 U13.9 U14.3 U14.5 U14.17@65.421,36.975 U15.8 U16.8 U17.8 VD1.2 VD2.2 X1.5 С1.1 С2.1 С3.1 С4.1 С5.1 С6.1 С7.1 С8.1 С9.1 С10.1 С11.1 С12.1 С15.1 С16.1 С17.1 С18.1 С19.1 С20.1 С21.1 С22.1 С23.1 С24.1 С25.1 С26.1 С27.1 С28.1
  other v1: 65.421,36.175 64.621,36.975 66.221,36.975 65.421,37.775
  other v2: 103.655,26.64 105.655,26.64 103.655,28.64 105.655,28.64
GND_VBat-3V3: С13.1 С14.1
I_USB_N: R67.1 U10.1
I_USB_P: R68.1 U10.12
MCU_VCP_RX: TP4.0 U10.7
MCU_VCP_TX: TP5.0 U10.10
NetC1_1: C1.1 R2.1
NetC1_2: C1.2 P6.3 P6.4 R6.1
NetC2_1: C2.1 R4.2 R5.1
NetC8_1: C8.1 L2.2 P2.1 P2.2
NetC9_2: C9.2 R32.2 R39.2 U5.5 С9.2
NetC11_1: C11.1 R42.1 R44.2
NetC12_1: C12.1
NetC13_1: C13.1 L3.2 P3.1 P3.2
NetC14_2: C14.2 R16.2 R46.2 U3.5 С1.2
NetC16_1: C16.1 R49.1 R51.2
NetC17_1: C17.1
NetC18_1: C18.1 L4.2 P5.1 P5.2
NetC19_2: C19.2 R24.2 R53.2 U4.5 С5.2
NetC21_1: C21.1 R56.1 R58.2
NetC22_1: C22.1
NetC23_2: C23.2 L5.2 R69.1
NetC24_2: C24.2 R1.1 R15.2 R17.2 R23.2 R25.2 R31.2 R33.2 R79.2 R87.2 R95.2 T1.1 TP1.0 TP2.0 TP3.0 U3.6 U4.6 U5.6 U15.5 U16.5 U17.5 С2.2 С6.2 С10.2 С17.2 С21.2 С25.2
NetC28_2: C28.2 C29.2 R69.2 R70.2 U10.2 U10.4
NetC32_1: C32.1 C37.2 L9.2
NetC34_2: C34.2 R104.2 R105.1
NetC35_2: C35.2 R103.2 R106.1
NetC36_2: C36.2 R102.2 R107.1
NetC38_1: C38.1
NetC38_2: C38.2
NetC39_1: C39.1 L10.1
NetC39_2: C39.2
NetC40_1: C40.1
NetC40_2: C40.2 C43.2 L14.1
NetC41_1: C41.1 C42.2 C46.1 L12.1
NetC41_2: C41.2 L13.1
NetC42_1: C42.1 C45.1 L9.1 L11.1 L12.2
NetC44_2: C44.2 L14.2
NetC47_1: C47.1 L13.2
NetC48_2: C48.2 C49.2
NetD1_1: D1.1 R15.1
NetD2_1: D2.1 R23.1
NetD3_1: D3.1 R31.1
NetD4_1: D4.1 R78.1
NetD5_1: D5.1 R86.1
NetD6_1: D6.1 R94.1
NetGK1_1: GK1.1 R9.2
NetGK1_3: GK1.3
NetL1_1: L1.1
NetL2_1: L2.1
NetL3_1: L3.1
NetL4_1: L4.1
NetL5_1: L5.1 X1.1
NetL6_1: L6.1 X1.0
NetL7_1: L7.1 L8.1 R73.1 U14.1 С14.2 С16.2
NetL7_2: L7.2
NetL8_2: L8.2
NetL11_2: L11.2 R13.2 R14.2
NetP1_1: P1.1 P1.2 R71.1 U14.11
NetP4_1: P4.1 P4.2 R72.1 U14.14
NetP6_1: P6.1 P6.2 R2.2 R3.2 T1.4 T1.6
NetR1_2: R1.2
NetR3_1: R3.1
NetR4_1: R4.1
NetR10_1: R10.1
NetR11_2: R11.2
NetR12_2: R12.2
NetR13_1: R13.1
NetR14_1: R14.1
NetR16_1: R16.1 R18.2 R21.1 U3.1
NetR17_1: R17.1 R19.2 U3.4
NetR18_1: R18.1 R20.2 U3.2
NetR21_R?: 
NetR22_2: R22.2 U3.9
NetR24_1: R24.1 R26.2 R29.1 U4.1
NetR25_1: R25.1 R27.2 U4.4
NetR26_1: R26.1 R28.2 U4.2
NetR29_R?: 
NetR30_2: R30.2 U4.9
NetR32_1: R32.1 R34.2 R37.1 U5.1
NetR33_1: R33.1 R35.2 U5.4
NetR34_1: R34.1 R36.2 U5.2
NetR37_R?: 
NetR38_2: R38.2 U5.9
NetR39_1: R39.1 R41.2
NetR40_1: R40.1 R43.2
NetR42_2: R42.2
NetR45_1: R45.1
NetR46_1: R46.1 R48.2
NetR47_1: R47.1 R50.2
NetR49_2: R49.2
NetR52_1: R52.1
NetR53_1: R53.1 R55.2
NetR54_1: R54.1 R57.2
NetR56_2: R56.2
NetR59_1: R59.1
NetR60_2: R60.2 R62.1
NetR61_2: R61.2 R63.1
NetR62_2: R62.2
NetR63_2: R63.2
NetR64_1: R64.1
NetR65_1: R65.1
NetR66_1: R66.1
NetR71_2: R71.2 R78.2 R80.2 TP6.0 U14.12 U15.6 С18.2
NetR72_2: R72.2 R86.2 R88.2 TP7.0 U14.15 U16.6 С22.2
NetR73_2: R73.2 R94.2 R96.2 TP8.0 U14.2 U17.6 С26.2
NetR74_2: R74.2 U14.9
NetR75_2: R75.2 U14.8
NetR76_2: R76.2 U14.13
NetR77_2: R77.2 U14.10
NetR79_1: R79.1 R81.2 R84.1 U15.1
NetR80_1: R80.1 R82.2 U15.4
NetR81_1: R81.1 R83.2 U15.2
NetR85_2: R85.2 U15.9
NetR87_1: R87.1 R89.2 R92.1 U16.1
NetR88_1: R88.1 R90.2 U16.4
NetR89_1: R89.1 R91.2 U16.2
NetR93_2: R93.2 U16.9
NetR95_1: R95.1 R97.2 R100.1 U17.1
NetR96_1: R96.1 R98.2 U17.4
NetR97_1: R97.1 R99.2 U17.2
NetR101_2: R101.2 U17.9
NetR108_1: R108.1
NetT1_2: T1.2
NetT1_5: T1.5
NetU3_3: U3.3
NetU3_7: U3.7 С4.2
NetU3_10: U3.10 С3.2
NetU4_3: U4.3
NetU4_7: U4.7 С8.2
NetU4_10: U4.10 С7.2
NetU5_3: U5.3
NetU5_7: U5.7 С12.2
NetU5_10: U5.10 С11.2
NetU11_2: С13.2
NetU15_3: U15.3
NetU15_7: U15.7 С20.2
NetU15_10: U15.10 С19.2
NetU16_3: U16.3
NetU16_7: U16.7 С24.2
NetU16_10: U16.10 С23.2
NetU17_3: U17.3
NetU17_7: U17.7 С28.2
NetU17_10: U17.10 С27.2
NetU18_5: 
PL_UART_RX: P1.3
PL_UART_TX: P1.4
PWR_CH_0: 
PWR_CH_1: 
PWR_CH_2: 
PWR_CH_3: 
PWR_CH_4: 
PWR_CH_5: 
RF_AMP_PWR_CTRL: 
RF_CTRL_0: R102.1
RF_CTRL_1: R103.1
RF_CTRL_2: R104.1
RF_IN_N: C50.1 L15.2
RF_IN_P: C48.1 L15.1
SPI1_MISO: U13.2
SPI1_MOSI: U13.5
SPI1_NSS: U13.1
SPI1_SCK: U13.6
SPI2_NSS: 
SWCLK: P7.2
SWDIO: P7.3
SYS_I2C_SCL: P4.4 R8.1 U14.6
SYS_I2C_SDA: P4.3 R7.1 U14.7
USB_N: C26.2 R67.2 VD2.1 X1.2
USB_P: C25.2 R68.2 VD1.1 X1.3
VDD_RF_1V55: C3.1 L1.2
pads on no net: R21.2 R29.2 R37.2 R84.2 R92.2 R100.2 T1.3 U10.6 U10.8 U10.11 U14.17@64.851,36.405 U14.17@64.851,37.544 U14.17@65.991,36.405 U14.17@65.991,37.544 X1.4
copper on no net:
  other v3: 2.25,2.25 37.25,2.25 2.25,37.25 37.25,37.25

## Silkscreen, mask and mechanical layers (free items; w line width, h text height)
Mechanical 1:
  circle w0.1: c2.25,37.25 r1
  circle w0.1: c37.25,37.25 r1
  circle w0.1: c37.25,2.25 r1
  circle w0.1: c2.25,2.25 r1
  lines w0.1: 5.5,39.5 0,39.5 0,0 39.5,0 39.5,34.5 cw(c39.5,35) 39.5,35.5 39.5,39.5 34,39.5 32,37.5 7.5,37.5 ; 5.5,39.5 7.5,37.5 ; 5.5,39.5 7.5,37.5
Mechanical 2:
  lines w0.1: -5,19.75 44.5,19.75 ; 0.75,2.25 3.75,2.25 ; 0.75,37.25 3.75,37.25 ; 2.25,0.75 2.25,3.75 ; 2.25,35.75 2.25,38.75 ; 19.75,-5 19.75,37.75 ; 35.75,2.25 38.75,2.25 ; 35.75,37.25 38.75,37.25 ; 37.25,0.75 37.25,3.75 ; 37.25,35.75 37.25,38.75
  text "cables slot" at 13.8,39.9 h1.2

## Dimensions
38.75,37.25 to 38.75,2.25 on Mechanical 2
2.25,38.75 to 37.25,38.75 on Mechanical 2
39.5,0 to 39.5,39.5 on Mechanical 2
0,39.5 to 39.5,39.5 on Mechanical 2